# EAGLE board TPJ remodel v3 (EAGLE 9.7.0)
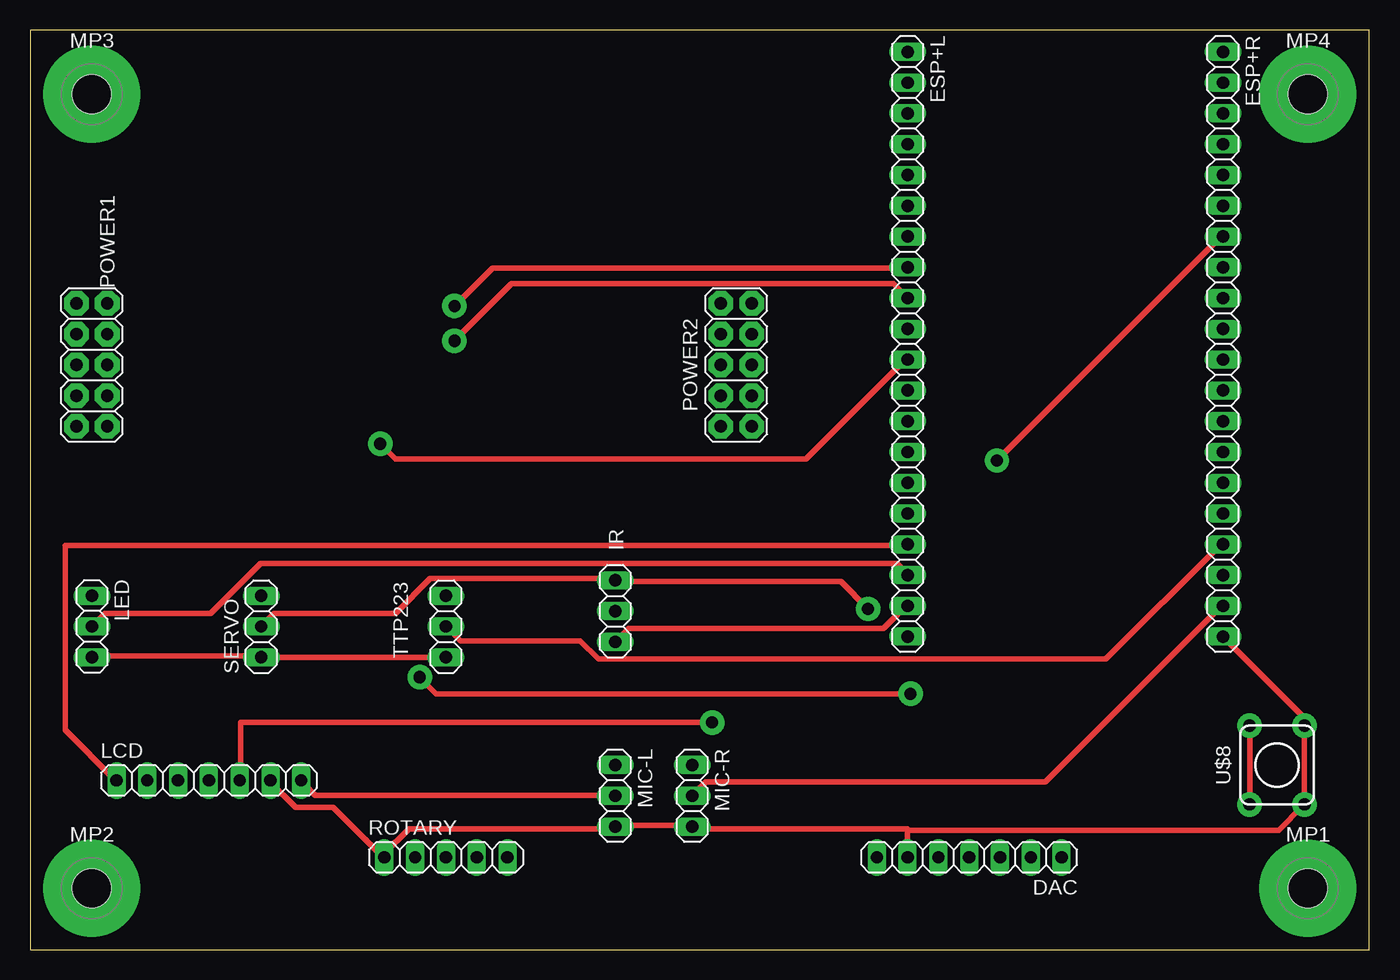
[diagram p0: board, top side]
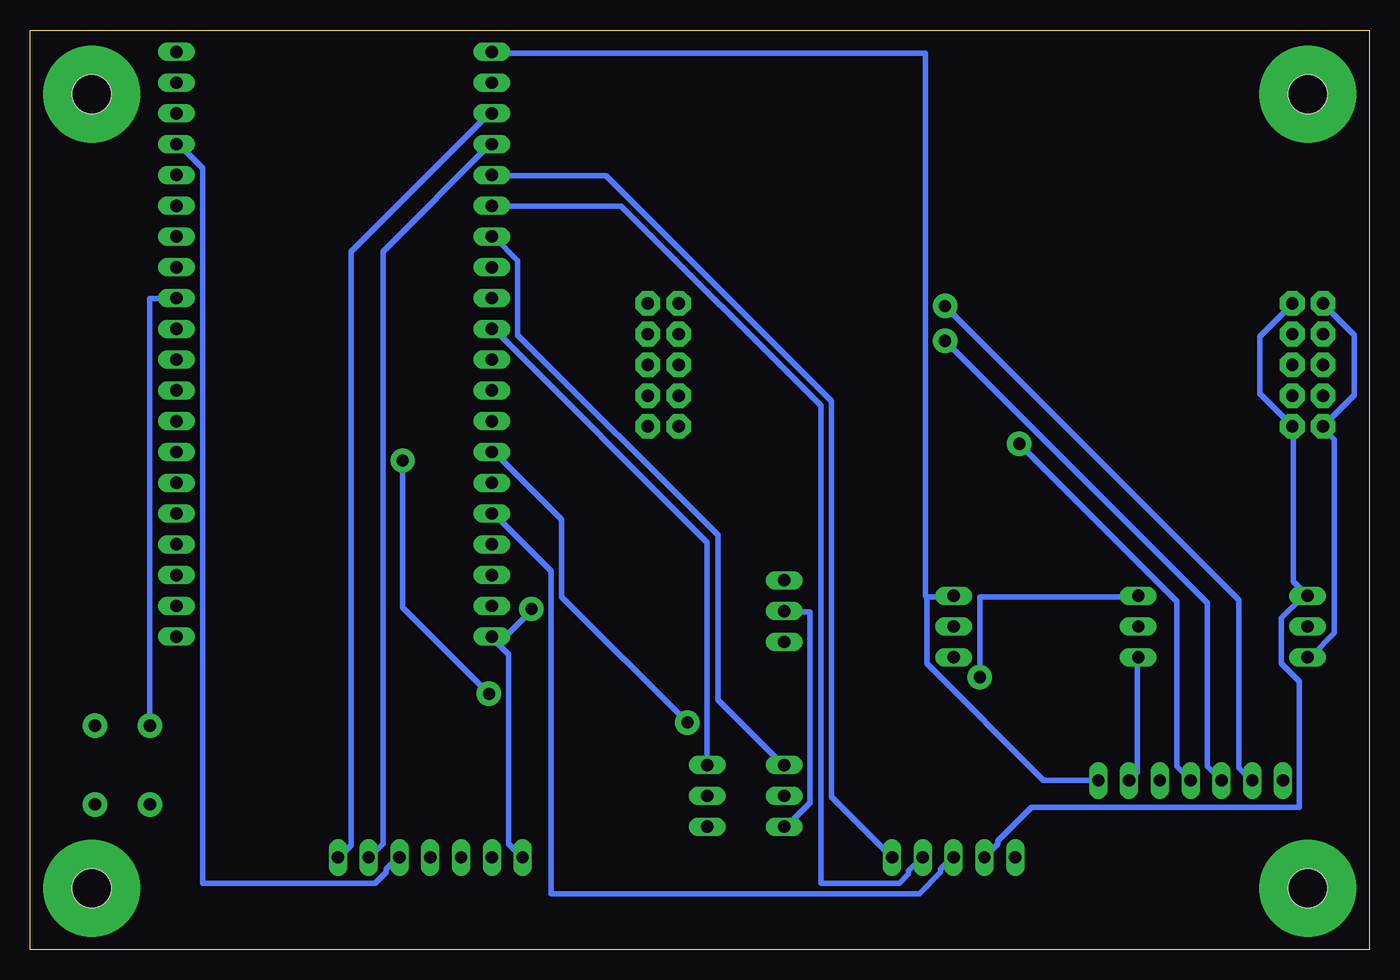
[diagram p1: board, bottom side, seen from below]

Size 110.47 x 75.87 mm. Coordinates in mm from the lower left corner, seen from the top.
Outline: 0,0 110.47,0 110.47,75.87 0,75.87 0,0
Copper layers (1*16): Top / Bottom
Stack-up Default Layer Stack: Top SilkScreen Epoxy Ink / Top SolderMask SR:Green 0.0254mm Dk 4.3 / Top Surface Finish Lead-Free 0.02mm / Top CuFoil:007 0.035mm / Dielectric-1 User Defined 1.5mm / Bottom CuFoil:007 0.035mm / Bottom Surface Finish Lead-Free 0.02mm / Bottom SolderMask SR:Green 0.0254mm Dk 4.3 / Bottom SilkScreen Epoxy Ink
Design rules: minimum copper width 18mil, minimum drill size 1mm, copper clearance wire_polygon to wire_polygon 14mil, copper clearance wire_polygon to pad_smd 14mil, copper clearance wire_polygon to via 14mil, copper clearance pad_smd to pad_smd 14mil, copper clearance pad_smd to via 14mil, copper clearance via to via 14mil, copper clearance smd to pad (same net) 14mil, copper clearance smd to via (same net) 14mil, copper clearance smd to smd (same net) 14mil, dimension clearance 40mil, via restrict clearance 0mil, restrict clearance 0mil, drill distance 6mil, keepout clearance 0mil

## Footprints (pad centres in the part's own frame; a part is rotated, then mirrored left to right if it is on the bottom)
1X07 = drill 1.016 long: 1 -7.62,0; 2 -5.08,0; 3 -2.54,0; 4 0,0; 5 2.54,0; 6 5.08,0; 7 7.62,0
1X20 = drill 1.016 long: 1 -24.13,0; 2 -21.59,0; 3 -19.05,0; 4 -16.51,0; 5 -13.97,0; 6 -11.43,0; 7 -8.89,0; 8 -6.35,0; 9 -3.81,0; 10 -1.27,0; 11 1.27,0; 12 3.81,0; 13 6.35,0; 14 8.89,0; 15 11.43,0; 16 13.97,0; 17 16.51,0; 18 19.05,0; 19 21.59,0; 20 24.13,0
1X03 = drill 1.016 long: 1 -2.54,0; 2 0,0; 3 2.54,0
STANDOFF_HEX_MALE-FEMALE_500X600_M3X0.5_MTGP800H320 = drill 3.2 pad 8: 1 0,0 | hole 3.2: 0,0
2X05 = drill 1.016 pad 2.032 octagon: 1 -5.08,-1.27; 2 -5.08,1.27; 3 -2.54,-1.27; 4 -2.54,1.27; 5 0,-1.27; 6 0,1.27; 7 2.54,-1.27; 8 2.54,1.27; 9 5.08,-1.27; 10 5.08,1.27
1X05 = drill 1.016 long: 1 -5.08,0; 2 -2.54,0; 3 0,0; 4 2.54,0; 5 5.08,0
SWITCH-MOMENTARY-PTH-6.5MM = drill 1.016 pad 2.032: 1 -3.251,2.261; 2 3.251,2.261; 3 -3.251,-2.261; 4 3.251,-2.261

## Placement (x,y rotation side)
DAC  PINHD-1X07_1X07M  [1X07]  77.47,7.62 180 top
ESP+L  PINHD-1X20_1X20M  [1X20]  72.39,49.96 270 top
ESP+R  PINHD-1X20_1X20M  [1X20]  98.4,49.96 270 top
IR  PINHD-1X03_1X03M  [1X03]  48.26,27.94 90 top
LCD  PINHD-1X07_1X07M  [1X07]  14.73,13.97 0 top
LED  PINHD-1X03_1X03M  [1X03]  5.08,26.67 270 top
MIC-L  PINHD-1X03_1X03M  [1X03]  48.26,12.7 270 top
MIC-R  PINHD-1X03_1X03M  [1X03]  54.61,12.7 270 top
MP1  STANDOFF_M/F_M3_6MM  [STANDOFF_HEX_MALE-FEMALE_500X600_M3X0.5_MTGP800H320]  105.41,5.08 0 top
MP2  STANDOFF_M/F_M3_6MM  [STANDOFF_HEX_MALE-FEMALE_500X600_M3X0.5_MTGP800H320]  5.08,5.08 0 top
MP3  STANDOFF_M/F_M3_6MM  [STANDOFF_HEX_MALE-FEMALE_500X600_M3X0.5_MTGP800H320]  5.08,70.58 0 top
MP4  STANDOFF_M/F_M3_6MM  [STANDOFF_HEX_MALE-FEMALE_500X600_M3X0.5_MTGP800H320]  105.41,70.58 0 top
POWER1  PINHD-2X5  [2X05]  5.08,48.26 90 top
POWER2  PINHD-2X5  [2X05]  58.25,48.26 90 top
ROTARY  PINHD-1X05_1X05M  [1X05]  34.29,7.62 0 top
SERVO  PINHD-1X03_1X03M  [1X03]  19.05,26.67 90 top
TTP223  PINHD-1X03_1X03M  [1X03]  34.29,26.67 90 top
U$8  PUSH_BUTTON  [SWITCH-MOMENTARY-PTH-6.5MM]  102.87,15.24 90 top

## Library data of the parts
DAC ESP+L IR = switchbut
ESP+R LCD SERVO = esp2.2
LED = a
MIC-L = dc
MIC-R = dd
MP1-MP4 = PCB-Fasteners_Hardware; CATEGORY: Standoff/Spacer; DESCRIPTION: Hex Standoff Threaded M3 6 mm; HEIGHT: 6 mm; PACKAGE_SIZE: NA; PACKAGE_TYPE: NA; SUBCATEGORY: Male-Female; THREADED: Threaded; THREAD_SIZE: M3; TYPE: Hex Standoff
POWER1 POWER2 = Connector2x6; CATEGORY: Connectors; DESCRIPTION: Header-Straight-2x5 Position; PACKAGE_TYPE: Through Hole; PITCH: 0.100" (2.54mm); SUBCATEGORY: Headers; TYPE: Male Pins
ROTARY TTP223 = tt
U$8 = SEMET 1

## Nets
N$1: ESP+R.9 U$8.1 U$8.2
N$2: DAC.6 ESP+R.20 IR.2 LCD.6 LED.3 MIC-L.3 MIC-R.3 POWER1.2 POWER1.10 ROTARY.1 SERVO.1 TTP223.1 U$8.3 U$8.4
N$3: DAC.7 ESP+L.20 IR.3 SERVO.2
N$4: ESP+L.1 LCD.7 MIC-L.2 TTP223.3
N$5: ESP+R.17 TTP223.2
N$6: ESP+R.7 SERVO.3
N$7: ESP+L.14 LCD.5
N$8: ESP+L.11 LCD.4
N$9: ESP+L.9 LCD.3
N$10: ESP+L.8 LCD.2
N$11: ESP+L.17 LCD.1
N$12: DAC.1 ESP+L.3
N$13: DAC.2 ESP+L.4
N$14: DAC.3 ESP+R.4
N$15: LED.1 POWER1.1 POWER1.9 ROTARY.2
N$16: ESP+L.5 ROTARY.5
N$17: ESP+L.6 ROTARY.4
N$18: ESP+L.16 ROTARY.3
N$19: ESP+L.18 LED.2
N$20: ESP+L.19 IR.1
N$21: ESP+L.7 MIC-L.1
N$22: ESP+L.10 MIC-R.1
N$23: ESP+R.19 MIC-R.2

## Tracks (layer width: path | path; a pad name or v marks a point on that pad's centre or on a via)
N$1
  Top 0.457: U$8.1 100.62,12 100.62,18.37 U$8.2
  Bottom 0.457: ESP+R.9 98.5,53.75 100.62,53.75 100.62,18.5 U$8.2
N$2
  Top 0.457: LCD.6 19.75,13.87 21.88,11.75 25,11.75 29.12,7.62 ROTARY.1 29.12,7.87 31.25,10 48.12,10 MIC-L.3 48.38,10.25 54.5,10.25 MIC-R.3 54.75,10 72.38,10 72.38,9.87 | LED.3 5.12,24.25 19,24.25 SERVO.1 19.25,24.12 34.25,24.12 TTP223.1 | ESP+R.20 98.5,25.75 105,19.25 105,18.62 U$8.4 105.12,18.37 U$8.3 105,11.87 103,9.87 72.38,9.87 | 72.38,9.87 72.38,7.62 DAC.6
  Bottom 0.457: LED.3 5,24.25 4.75,24.25 2.88,26.12 2.88,42.12 3.75,43 POWER1.2 1.25,45.75 1.25,50.74 3.81,53.31 POWER1.10 | LCD.6 19.75,14 19.12,14.62 19.12,24.12 SERVO.1 | IR.2 48.25,27.87 46.12,27.87 46.12,12.12 48,10.25 48.25,10.25 MIC-L.3
N$3  (via drill 1)
  Top 0.457: SERVO.2 20.12,27.75 30.12,27.75 33,30.62 48.12,30.62 48.25,30.5 IR.3 48.38,30.37 66.88,30.37 v69.12,28.12
  Bottom 0.457: DAC.7 69.88,7.62 71,8.75 71,24.37 72.38,25.75 ESP+L.20 71.75,25.37 69.12,28 v69.12,28.12
N$4
  Top 0.457: LCD.7 22.38,13.87 23.5,12.75 48.25,12.75 MIC-L.2
  Bottom 0.457: 36.5,29.12 34.38,29.12 TTP223.3 | 36.5,29.12 36.5,23.62 26.88,14 22.38,14 LCD.7 | ESP+L.1 72.38,74 36.62,74 36.62,29.25 36.5,29.12
N$5
  Top 0.457: TTP223.2 34.38,26.62 35.5,25.5 45.38,25.5 46.88,24 88.75,24 98.12,33.37 98.38,33.37 ESP+R.17
N$6  (via drill 1)
  Top 0.457: v32.12,22.5 33.5,21.12 v72.62,21.12 | v79.75,40.37 98.12,58.75 98.38,58.75 ESP+R.7
  Bottom 0.457: v32.12,22.5 32.12,29.12 19.12,29.12 SERVO.3 | v72.62,21.12 79.75,28.25 v79.75,40.37
N$7  (via drill 1)
  Top 0.457: v56.25,18.75 17.38,18.75 17.38,14 LCD.5
  Bottom 0.457: v56.25,18.75 66.62,29.12 66.62,35.5 72.12,41 72.38,41 ESP+L.14
N$8  (via drill 1)
  Top 0.457: v28.88,41.75 30.14,40.48 63.98,40.48 72.12,48.62 72.38,48.62 ESP+L.11
  Bottom 0.457: v28.88,41.75 15.88,28.75 15.88,15.12 14.75,14 LCD.4
N$9  (via drill 1)
  Top 0.457: ESP+L.9 71.2,54.97 39.72,54.97 v35,50.25
  Bottom 0.457: v35,50.25 13.38,28.62 13.38,15.12 12.25,14 LCD.3
N$10  (via drill 1)
  Top 0.457: v35,53.12 38.12,56.25 72.38,56.25 ESP+L.8
  Bottom 0.457: v35,53.12 10.75,28.87 10.75,15 9.75,14 LCD.2
N$11
  Top 0.457: LCD.1 7,14 2.88,18.12 2.88,33.37 72.38,33.37 ESP+L.17
N$12
  Bottom 0.457: DAC.1 85,7.62 84,8.62 84,57.62 72.5,69.12 ESP+L.3
N$13
  Bottom 0.457: DAC.2 82.5,7.62 81.38,8.75 81.38,57.62 72.5,66.5 ESP+L.4
N$14
  Bottom 0.457: DAC.3 80.12,7.62 81.12,6.62 81.12,6.37 82,5.5 96.25,5.5 96.25,64.5 98.12,66.37 98.38,66.37 ESP+R.4
N$15
  Bottom 0.457: POWER1.9 6.38,53.25 9.02,50.6 9.02,45.89 6.5,43.37 POWER1.1 6.25,43.12 6.25,30.37 5.12,29.25 LED.1 5.38,29.25 7.25,27.37 7.25,23.62 5.75,22.12 5.75,11.75 27.88,11.75 30.62,9 30.62,8.75 ROTARY.2
N$16
  Bottom 0.457: ROTARY.5 44.38,12.62 44.38,45.27 62.98,63.87 72.38,63.87 ESP+L.5
N$17
  Bottom 0.457: ROTARY.4 36.88,7.62 38,6.5 38,6.25 38.75,5.5 45.25,5.5 45.25,44.89 61.73,61.37 72.38,61.37 ESP+L.6
N$18
  Bottom 0.457: ROTARY.3 34.38,7.62 35.38,6.62 35.38,6.37 37.12,4.62 67.5,4.62 67.5,31.25 72.12,35.87 72.38,35.87 ESP+L.16
N$19
  Top 0.457: LED.2 5.12,26.75 6.12,27.75 14.88,27.75 19,31.87 71.5,31.87 72.38,31 ESP+L.18
N$20
  Top 0.457: IR.1 48.38,25.5 49.38,26.5 70.38,26.5 72.25,28.37 72.38,28.37 ESP+L.19
N$21
  Bottom 0.457: MIC-L.1 48.38,15.25 53.75,20.62 53.75,34.22 70.25,50.73 70.25,56.87 72.12,58.75 72.38,58.75 ESP+L.7
N$22
  Bottom 0.457: MIC-R.1 54.62,15.25 54.62,33.62 72.12,51.12 72.38,51.12 ESP+L.10
N$23
  Top 0.457: MIC-R.2 54.62,12.75 55.75,13.87 83.75,13.87 98.25,28.37 98.38,28.37 ESP+R.19